# Altium PCB Etage Reception 1.PcbDoc
Units mm, origin at the board's own origin, x right, y up, seen from the top; angles counter-clockwise.
Board outline 70 x 70 mm, 4 copper layers (Top Layer, Internal Plane 1, Internal Plane 2, Bottom Layer); 30 components, 20 nets, 80 pads, 0 vias.
Unrouted connection lines stored in the file: 57.
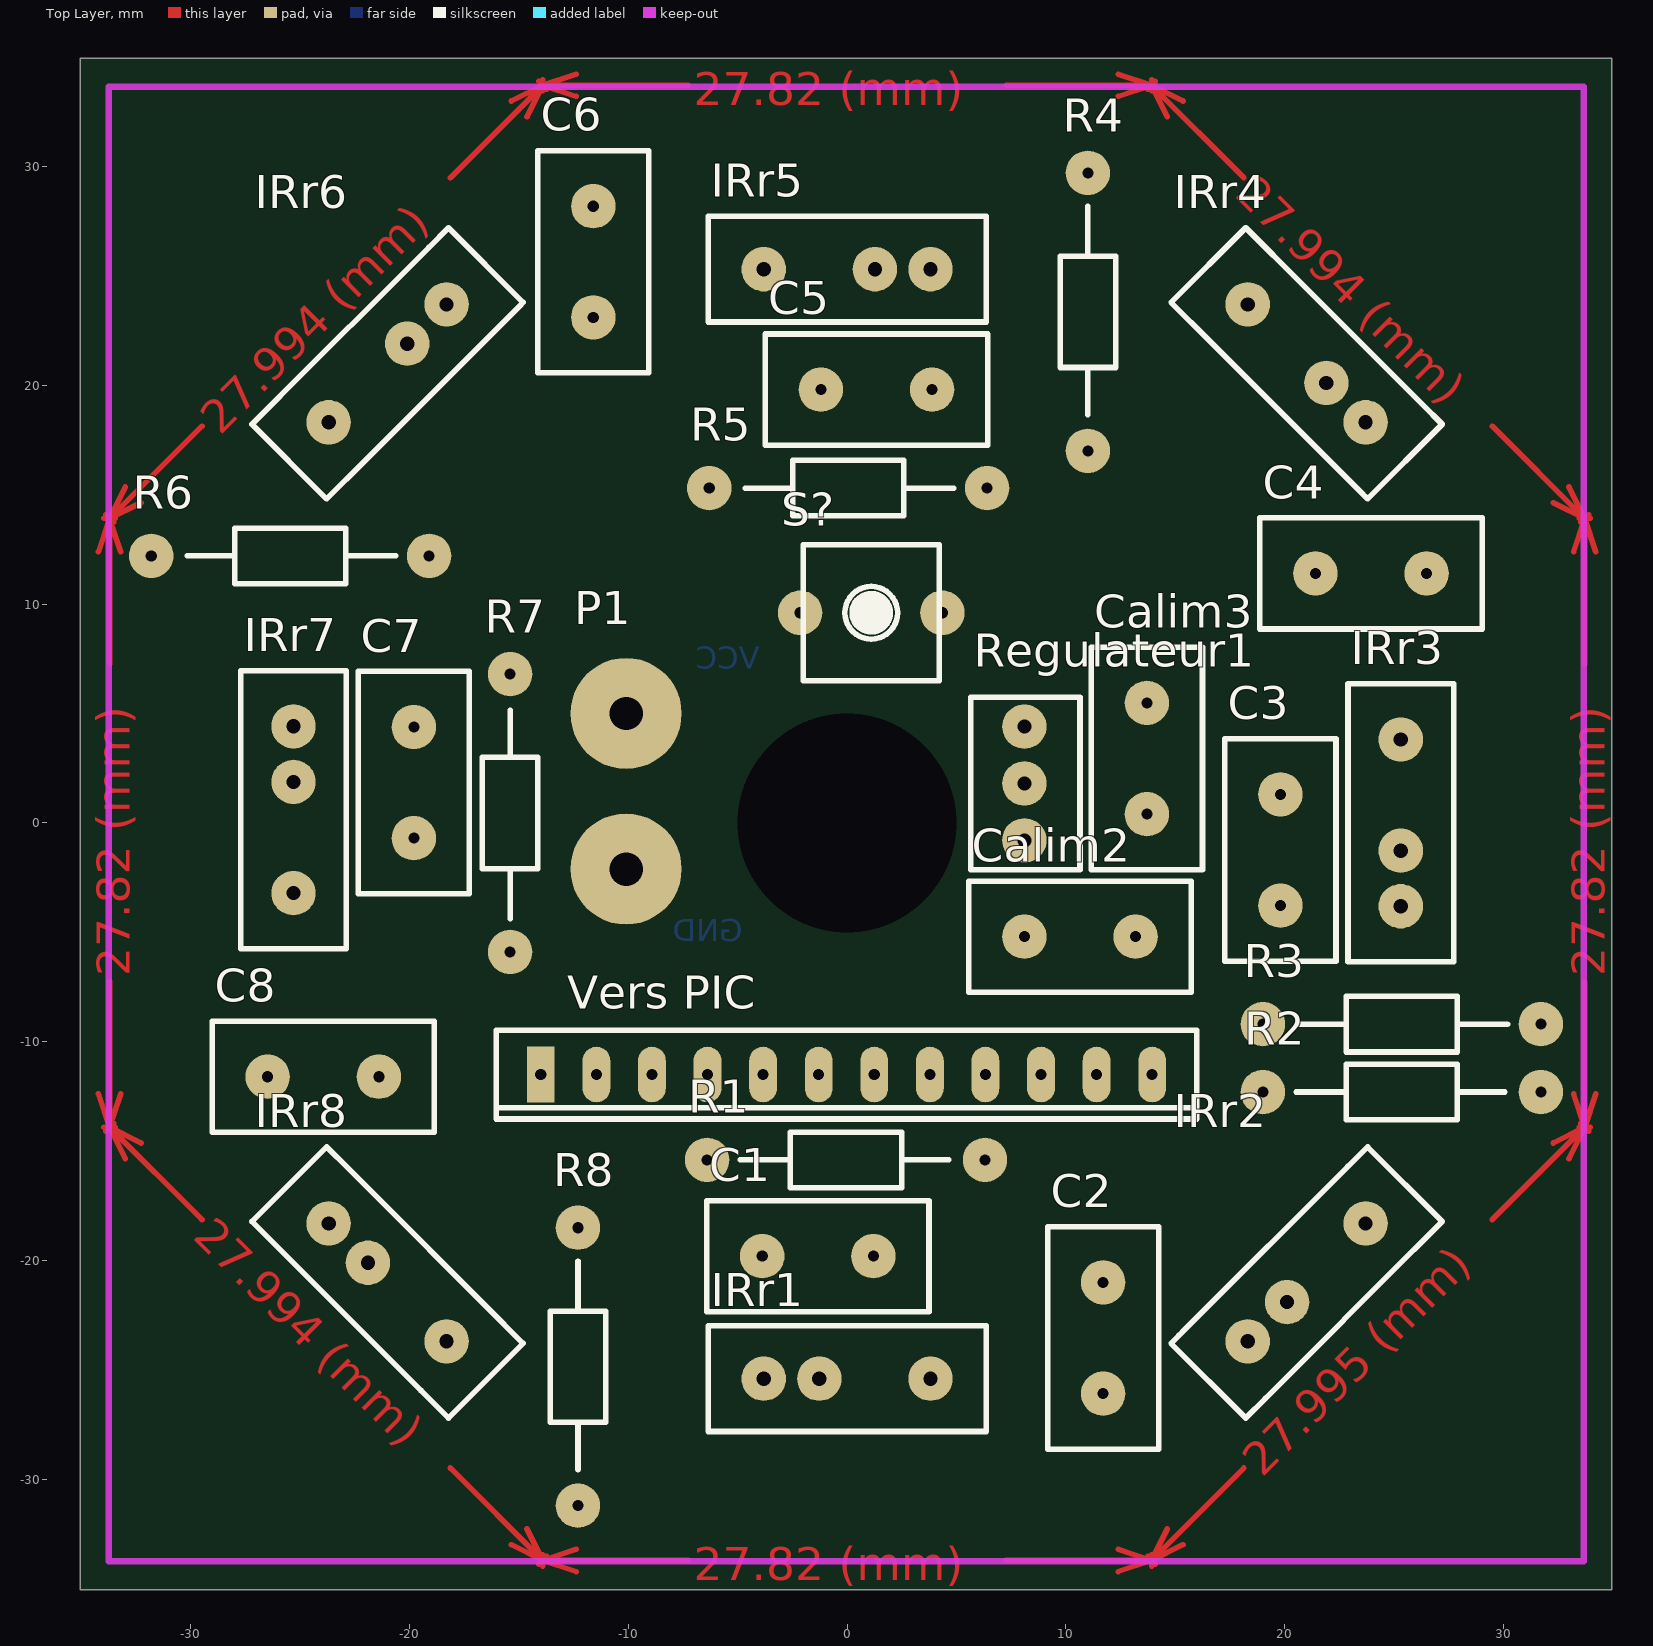
[diagram p0: Top Layer view]
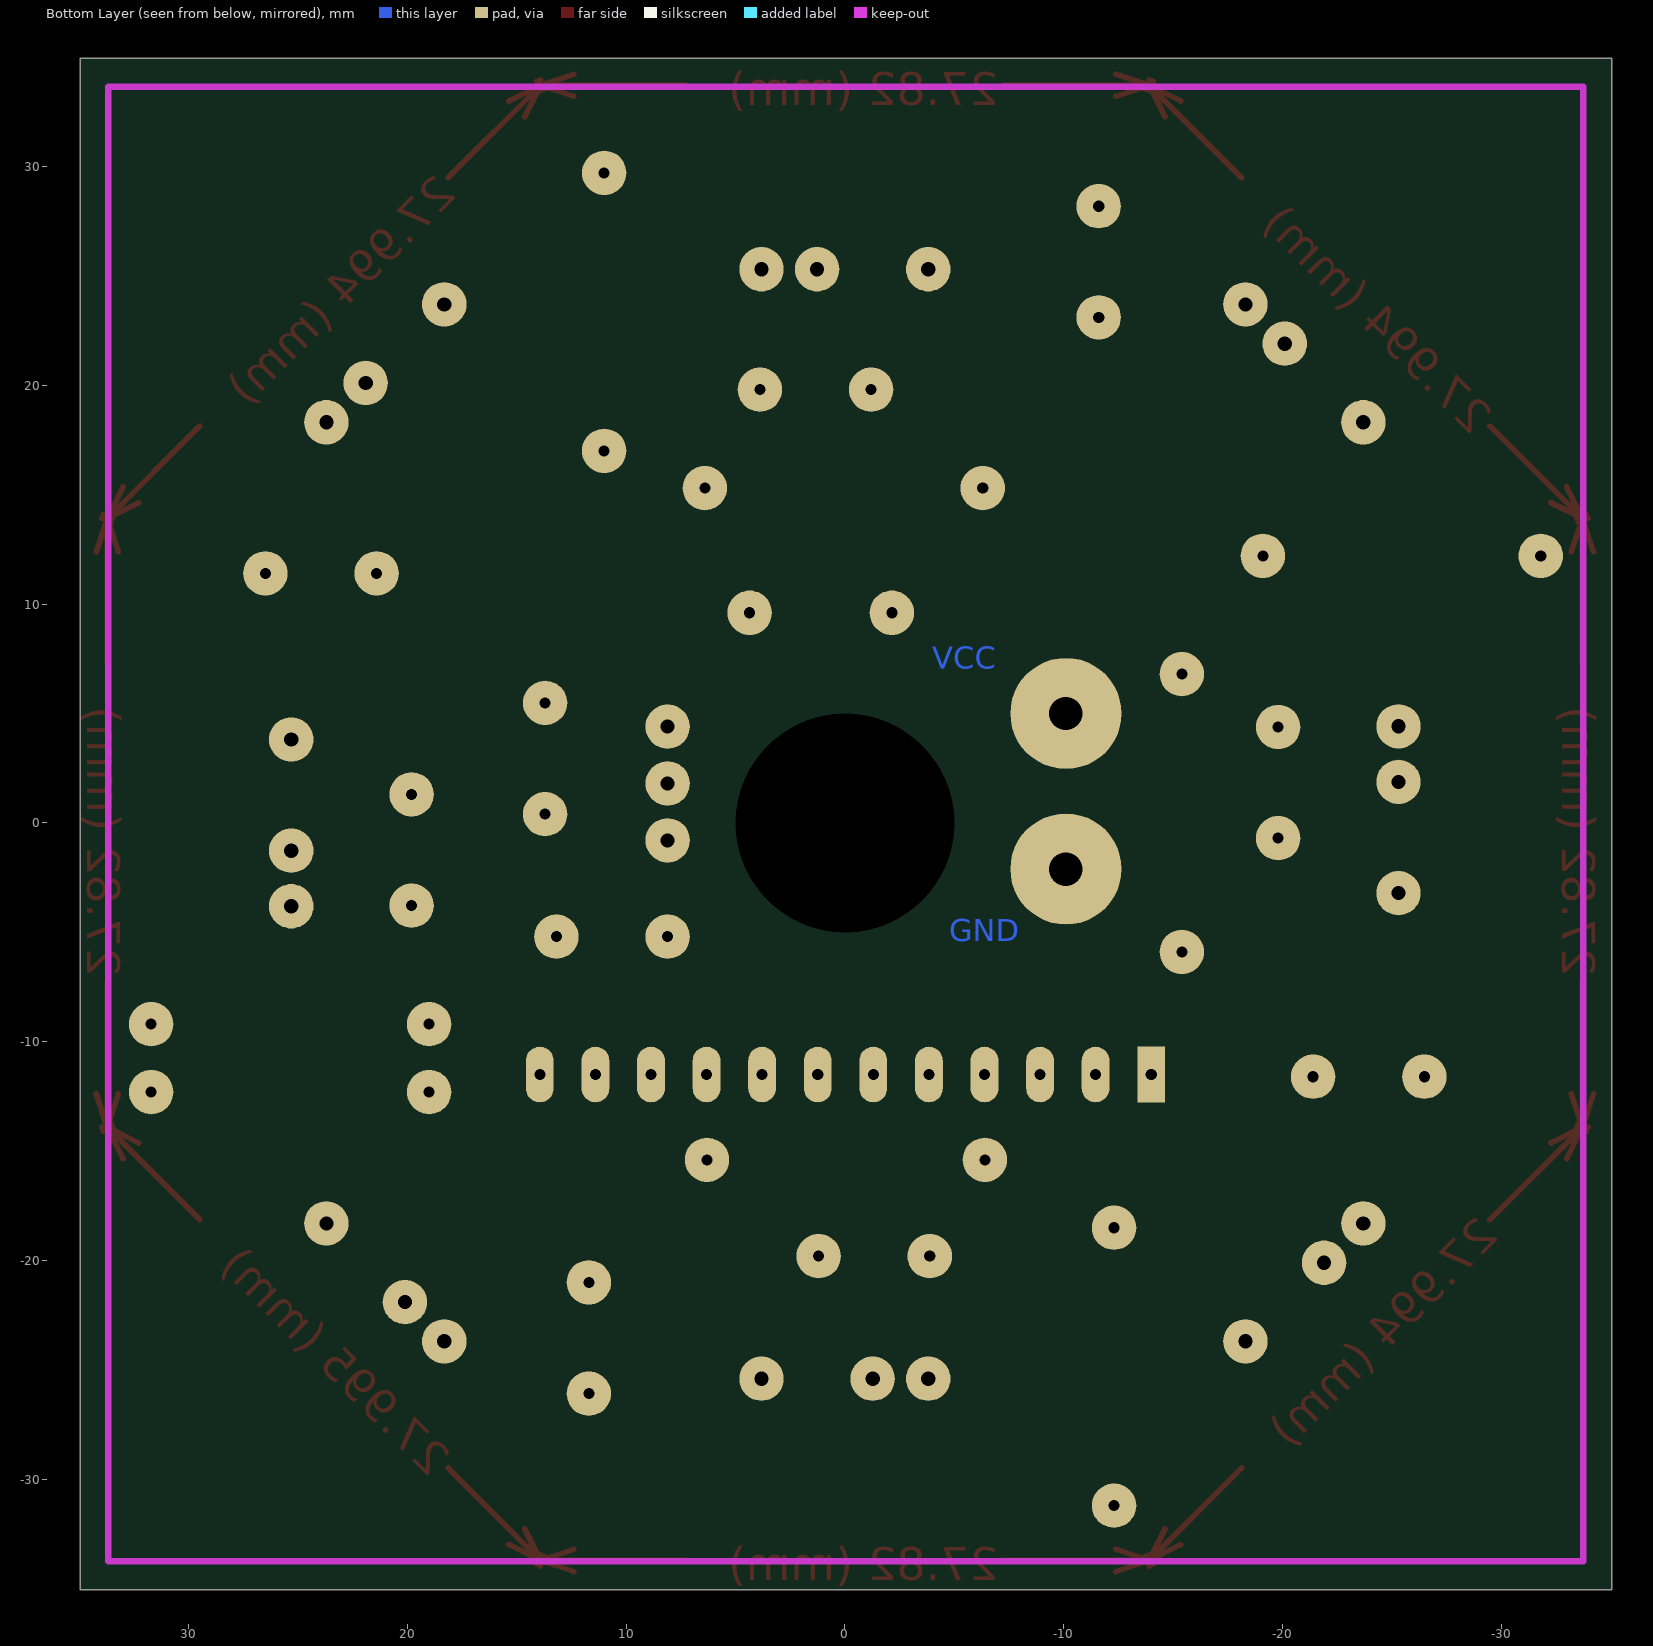
[diagram p1: Bottom Layer view, seen from below]
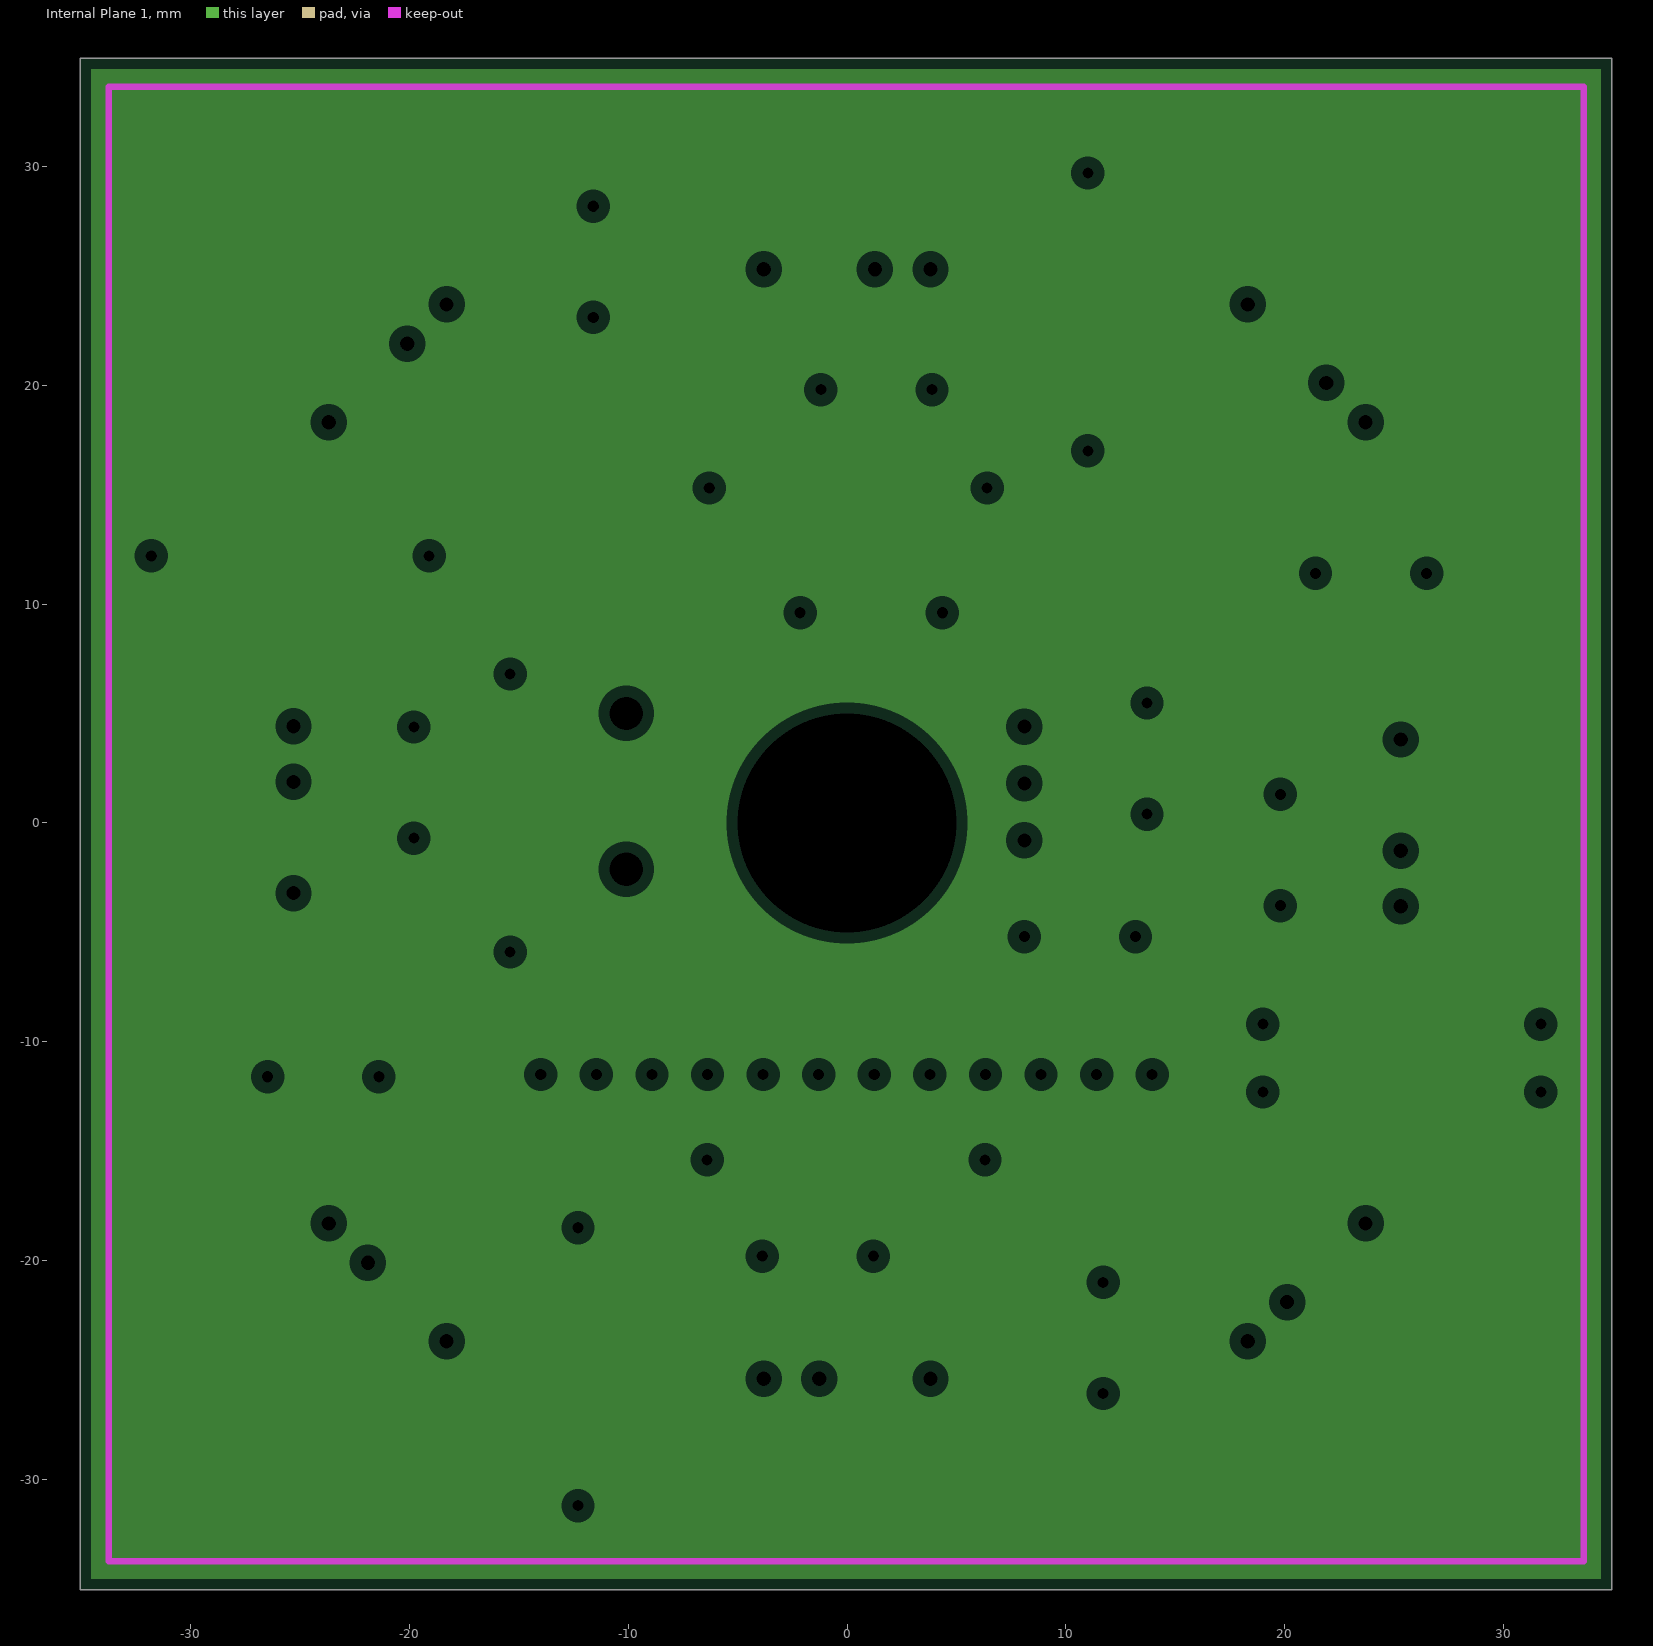
[diagram p2: Internal Plane 1, clearances drawn from the general rule]
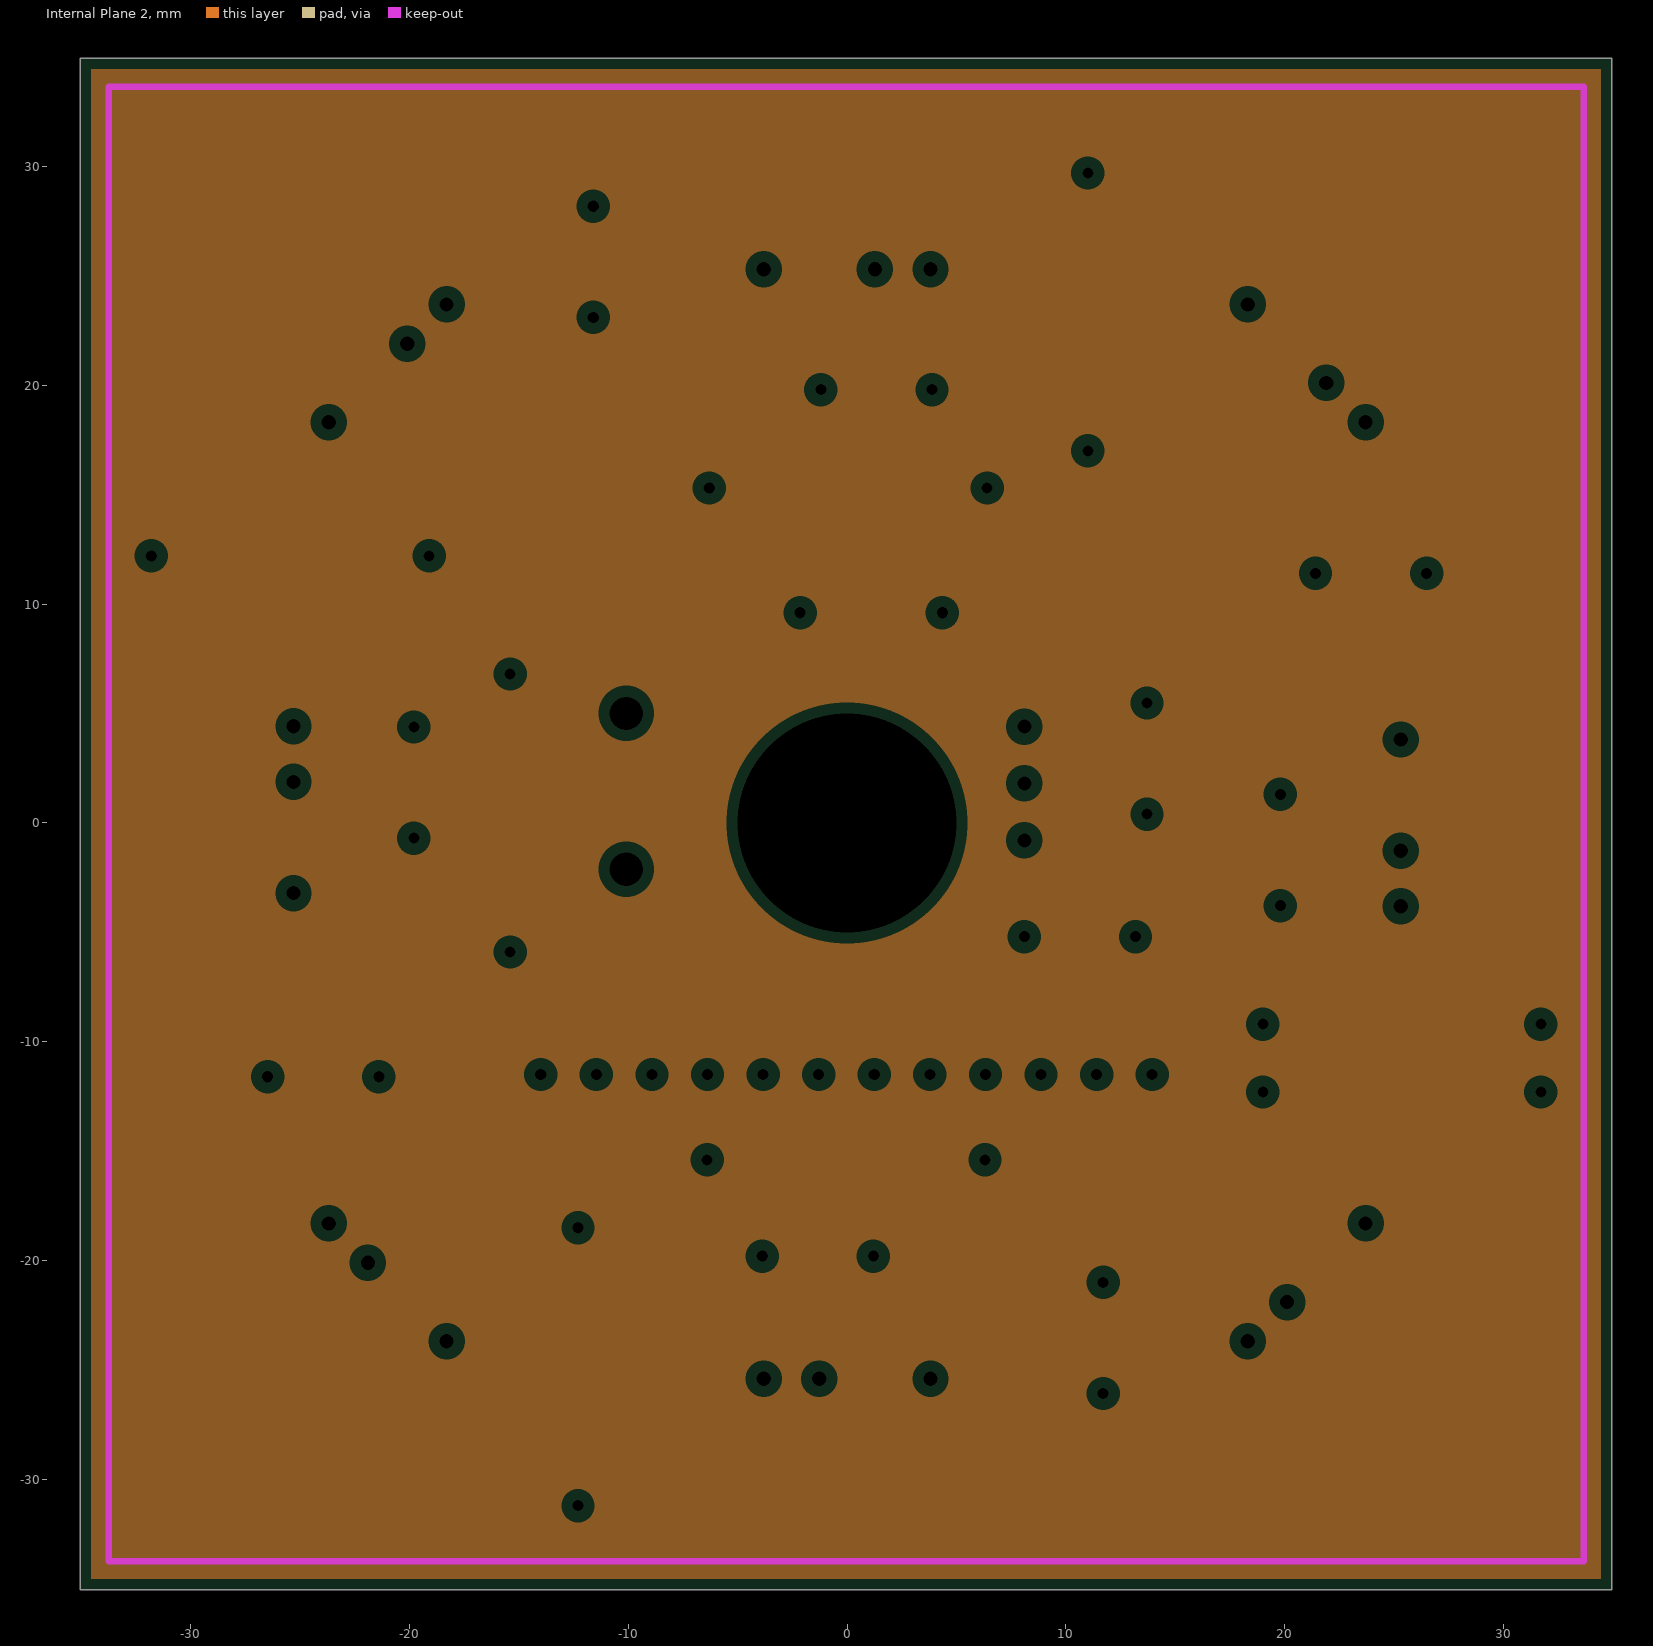
[diagram p3: Internal Plane 2, clearances drawn from the general rule]

## Layer stack, top to bottom
Top Layer: signal copper 0.0356
Dielectric: dielectric 0.32, FR-4, Dk 4.8
Internal Plane 1: plane copper 0.0356
Dielectric: dielectric 0.32, FR-4, Dk 4.8
Internal Plane 2: plane copper 0.0356
Dielectric: dielectric 0.32, FR-4, Dk 4.8
Bottom Layer: signal copper 0.0356

## Board outline
-35.052,-35.052 34.948,-35.052 34.948,34.948 -35.052,34.948

## Design rules (kind name [scope] priority, off if disabled: settings)
Clearance [All] p1: gap=0.2
PlaneClearance [All] p1: clearance=0.508
PlaneConnect [All] p1: planeconnectstyle=Relief reliefexpansion=0.508 reliefentries=4 reliefconductorwidth=0.254 reliefairgap=0.254
PolygonConnect [All] p1: connectstyle=Relief reliefconductorwidth=0.254 reliefentries=4 polygonreliefangle="90 Angle" airgapwidth=0.254
RoutingLayers [All] p1: top layer_v5=FALSE bottom layer_v5=TRUE
RoutingVias [All] p1: holewidth=0.6 width=1 viastyle="Through Hole" minholewidth=0.711 minwidth=1.27 maxholewidth=0.711 maxwidth=1.27
SolderMaskExpansion [All] p1: expansion=0.102
Width [All] p1: maxlimit=0.254 minlimit=0.254 preferedwidth=0.254
25 further rules are at their usual default settings.

## Components (designator, comment, footprint, x,y, rotation, side; value= is the part's Value field where it differs from the comment)
C1 "Cap2" CAPA2 1.2,-19.8 r180 top
C2 "Cap2" CAPA2 11.7,-21 r270 top
C3 "Cap2" CAPA2 19.8,1.3 r270 top
C4 "Cap2" CAPA2 21.4,11.4 r0 top
C5 "Cap2" CAPA2 -1.2,19.8 r0 top
C6 "Cap2" CAPA2 -11.6,23.1 r90 top
C7 "Cap2" CAPA2 -19.8,-0.7 r90 top
C8 "Cap2" CAPA2 -21.4,-11.6 r180 top
Calim2 "Cap2" CAPA2 8.1,-5.2 r0 top
Calim3 "Cap2" CAPA2 13.7,0.4 r90 top
IRr1 "Recepteur IR" TSOP1138 0,-25.4 r180 top
IRr2 "Recepteur IR" TSOP1138 21,-21 r225 top
IRr3 "Recepteur IR" TSOP1138 25.3,0 r270 top
IRr4 "Recepteur IR" TSOP1138 21,21 r315 top
IRr5 "Recepteur IR" TSOP1138 0,25.3 r0 top
IRr6 "Recepteur IR" TSOP1138 -21,21 r45 top
IRr7 "Recepteur IR" TSOP1138 -25.3,0.6 r90 top
IRr8 "Recepteur IR" TSOP1138 -21,-21 r135 top
P1 "Alim2mm_Simple" Alim2mm_simple -10.1,5 r0 top
R1 "Res2" res5_1/4W -6.4,-15.4 r0 top
R2 "Res2" res5_1/4W 19,-12.3 r0 top
R3 "Res2" res5_1/4W 31.7,-9.2 r180 top
R4 "Res2" res5_1/4W 11,29.7 r270 top
R5 "Res2" res5_1/4W 6.4,15.3 r180 top
R6 "Res2" res5_1/4W -19.1,12.2 r180 top
R7 "Res2" res5_1/4W -15.4,-5.9 r90 top
R8 "Res2" res5_1/4W -12.3,-18.5 r270 top
Regulateur1 "LP2950" PCBComponent_1 8.1,1.8 r270 top
S? "SW-PB_2" SW_BP_2 1.1,9.6 r180 top
"Vers PIC" "CONKK12" CONKK12 -14,-11.5 r0 top

## Footprints (in the part's own frame and the unit in brackets; to place one, negate y for a bottom-side part, rotate by r counter-clockwise, add the part's x,y. Pads: shape width x height; smd on the part's side, far side on the other; paste and mask are expansions set on the pad)
Alim2mm_simple [mil]
  round 200 hole 60: 1(0,0) 2(0,-280)
CAPA2 [mil]
  round 80 hole 20: 1(0,0) 2(200,0)
  silkscreen extent -100,-100 300,100
CONKK12 [mil]
  rect 50x100 hole 20: 1(0,0)
  oval 50x100 hole 20: 2(100,0) 3(200,0) 4(300,0) 5(400,0) 6(500,0) 7(600,0) 8(700,0) 9(800,0) 10(900,0) 11(1000,0) 12(1100,0)
  silkscreen extent -80,-80 1180,80
PCBComponent_1 [mil]
  round 80 hole 25.59: GND(0,0) In(102.36,0) Out(-102.36,0)
  silkscreen extent -155,-96 155,100
res5_1/4W [mil]
  round 80 hole 20: 1(0,0) 2(500,0)
  silkscreen extent 60,-50 435,50
SW_BP_2 [mil]
  round 80 hole 20: 1(-127.95,0) 2(127.95,0)
  silkscreen extent -122,-122 122,122
TSOP1138 [mil]
  round 80 hole 25.59: GND(150,0) Vo(-150,0) Vs(50,0)
  silkscreen extent -250,-95 250,95

## Part data
C1 C2 C3 C4 C5 C6 C7 C8 Calim2 Calim3: "Capacitor"
IRr1 IRr2 IRr3 IRr4 IRr5 IRr6 IRr7 IRr8: library part TSOP1138
P1: "2-Pin"
R1 R2 R3 R4 R5 R6 R7 R8: "Resistor"
S?: "Switch"

## Free pads (board coordinates)
  round 1.524 hole 10: 5(0,0)

## Nets (pads, with @x,y where several pads share a name; then routed paths per layer and width w, separated by ;. In a path a pad name is that pad's centre, name@x,y a point inside that pad or via, vN(x,y) a via of type N, cw(c..) or ccw(c..) an arc to the next point about the centre after c; other vN are vias at no path point)
GND: "Vers PIC.12" C1.2 C2.2 C3.2 C4.2 C5.2 C6.2 C7.2 C8.2 Calim2.2 Calim3.1 IRr1.GND IRr2.GND IRr3.GND IRr4.GND IRr5.GND IRr6.GND IRr7.GND IRr8.GND P1.2 Regulateur1.GND
NetC1_1: C1.1 IRr1.Vs R1.1
NetC2_1: C2.1 IRr2.Vs R2.1
NetC3_1: C3.1 IRr3.Vs R3.1
NetC4_1: C4.1 IRr4.Vs R4.1
NetC5_1: C5.1 IRr5.Vs R5.1
NetC6_1: C6.1 IRr6.Vs R6.1
NetC7_1: C7.1 IRr7.Vs R7.1
NetC8_1: C8.1 IRr8.Vs R8.1
NetIRr1_3: "Vers PIC.1" IRr1.Vo
NetIRr2_3: "Vers PIC.2" IRr2.Vo
NetIRr3_3: "Vers PIC.3" IRr3.Vo
NetIRr4_3: "Vers PIC.4" IRr4.Vo
NetIRr5_3: "Vers PIC.8" IRr5.Vo
NetIRr6_3: "Vers PIC.7" IRr6.Vo
NetIRr7_3: "Vers PIC.6" IRr7.Vo
NetIRr8_3: "Vers PIC.5" IRr8.Vo
NetP1_1: P1.1 S?.2
VALIM: Calim2.1 Regulateur1.In S?.1
VREG: "Vers PIC.11" Calim3.2 R1.2 R2.2 R3.2 R4.2 R5.2 R6.2 R7.2 R8.2 Regulateur1.Out
pads on no net: "Vers PIC.9" "Vers PIC.10"
copper on no net: | length 160.5
  Top Layer w0.254: -34.213,-12.386 -33.705,-13.91 ; -34.213,12.386 -33.705,13.91 ; -33.959,-13.91 -33.451,-13.91 ; -33.959,13.91 -33.451,13.91 ; -33.885,-14.09 -33.525,-13.73 ; -33.885,14.09 -33.525,13.73 ; -33.705,-7.262 -33.705,-13.91 ; -33.705,7.262 -33.705,13.91 ; -33.197,-12.386 -33.705,-13.91 ; -33.197,12.386 -33.705,13.91 ; -32.987,-15.347 -33.705,-13.91 ; -32.987,15.347 -33.705,13.91 ; -32.268,-14.628 -33.705,-13.91 ; -32.268,14.628 -33.705,13.91 ; -29.481,-18.134 -33.705,-13.91 ; -29.481,18.134 -33.705,13.91 ; -18.134,-29.481 -13.91,-33.705 ; -18.134,29.481 -13.91,33.705 ; -15.347,-32.987 -13.91,-33.705 ; -15.347,32.987 -13.91,33.705 ; -14.628,-32.268 -13.91,-33.705 ; -14.628,32.268 -13.91,33.705 ; -14.09,-33.885 -13.73,-33.525 ; -14.09,33.885 -13.73,33.525 ; -13.91,-33.959 -13.91,-33.451 ; -13.91,33.451 -13.91,33.959 ; -12.386,-34.213 -13.91,-33.705 ; -12.386,-33.197 -13.91,-33.705 ; -12.386,33.197 -13.91,33.705 ; -12.386,34.213 -13.91,33.705 ; -7.262,-33.705 -13.91,-33.705 ; -7.262,33.705 -13.91,33.705 ; 7.262,-33.705 13.91,-33.705 ; 7.262,33.705 13.91,33.705 ; 12.386,-34.213 13.91,-33.705 ; 12.386,-33.197 13.91,-33.705 ; 12.386,33.197 13.91,33.705 ; 12.386,34.213 13.91,33.705 ; 13.73,-33.526 14.09,-33.885 ; 13.73,33.525 14.09,33.885 ; 13.91,-33.959 13.91,-33.451 ; 13.91,33.451 13.91,33.959 ; 14.628,-32.269 13.91,-33.705 ; 14.628,32.268 13.91,33.705 ; 15.347,-32.987 13.91,-33.705 ; 15.347,32.987 13.91,33.705 ; 18.134,-29.482 13.91,-33.705 ; 18.134,29.481 13.91,33.705 ; 29.481,-18.134 33.705,-13.91 ; 29.481,18.134 33.705,13.91 ; 32.268,-14.628 33.705,-13.91 ; 32.268,14.628 33.705,13.91 ; 32.987,-15.347 33.705,-13.91 ; 32.987,15.347 33.705,13.91 ; 33.197,-12.386 33.705,-13.91 ; 33.197,12.386 33.705,13.91 ; 33.451,-13.91 33.959,-13.91 ; 33.451,13.91 33.959,13.91 ; 33.525,-13.73 33.885,-14.09 ; 33.525,13.73 33.885,14.09 ; 33.705,-7.262 33.705,-13.91 ; 33.705,7.262 33.705,13.91 ; 34.213,-12.386 33.705,-13.91 ; 34.213,12.386 33.705,13.91

## Polygon pours and split planes (outlines as drawn)
no net on Internal Plane 1 (split plane): 34.438,-34.542 -34.542,-34.542 -34.542,34.438 34.438,34.438
no net on Internal Plane 2 (split plane): 34.438,-34.542 -34.542,-34.542 -34.542,34.438 34.438,34.438

## Keep-outs
Keep-Out Layer:
  lines w0.3: -33.752,-33.752 33.655,-33.752 33.655,33.648 -33.752,33.648 -33.752,-33.752

## Other copper
Top Layer:
  text "27.82 (mm)" at -7.008,32.791 h1.52
  text "27.994 (mm)" at 17.667,28.655 h1.52 r315
  text "27.994 (mm)" at -28.655,17.667 h1.52 r45
  text "27.82 (mm)" at -32.791,-7.008 h1.52 r90
  text "27.82 (mm)" at 34.619,-7.008 h1.52 r90
  text "27.994 (mm)" at -29.948,-18.96 h1.52 r315
  text "27.995 (mm)" at 18.96,-29.948 h1.52 r45
  text "27.82 (mm)" at -7.008,-34.619 h1.52

## Silkscreen, mask and mechanical layers (free items; w line width, h text height)
Drill Drawing:
  text ".LEGEND" at -76.304,-67.564 h1.52
  text "Drill Drawing." at -76.304,-70.104 h1.52

## Dimensions
-33.752,-33.752 to 33.655,-33.752 on Mechanical 1
-33.752,-33.752 to -33.752,33.648 on Mechanical 1

## Text inside footprints (layer, text, board x,y; h text height)
P1: Bottom Layer "VCC" at -4.004,7.032 h1.02; Bottom Layer "GND" at -4.766,-5.414 h1.02